# EAGLE board BMM (EAGLE 6.5.0)
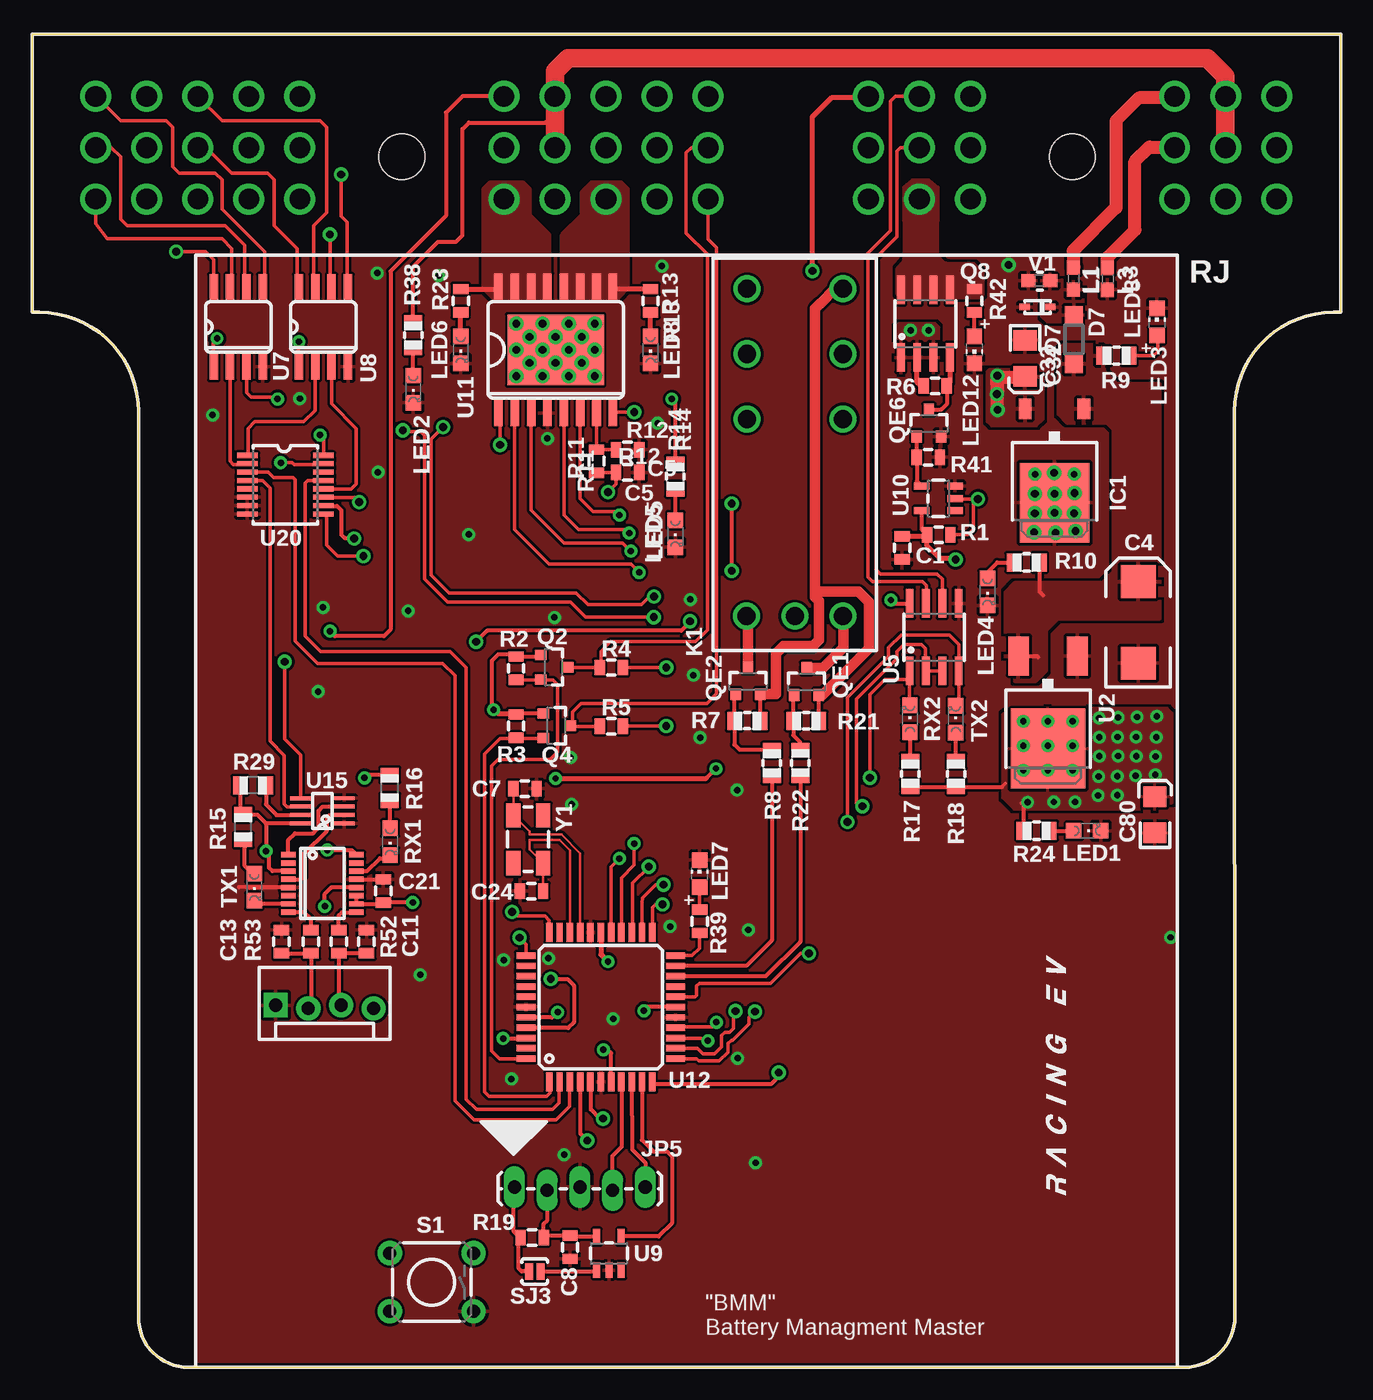
[diagram p0: board, top side]
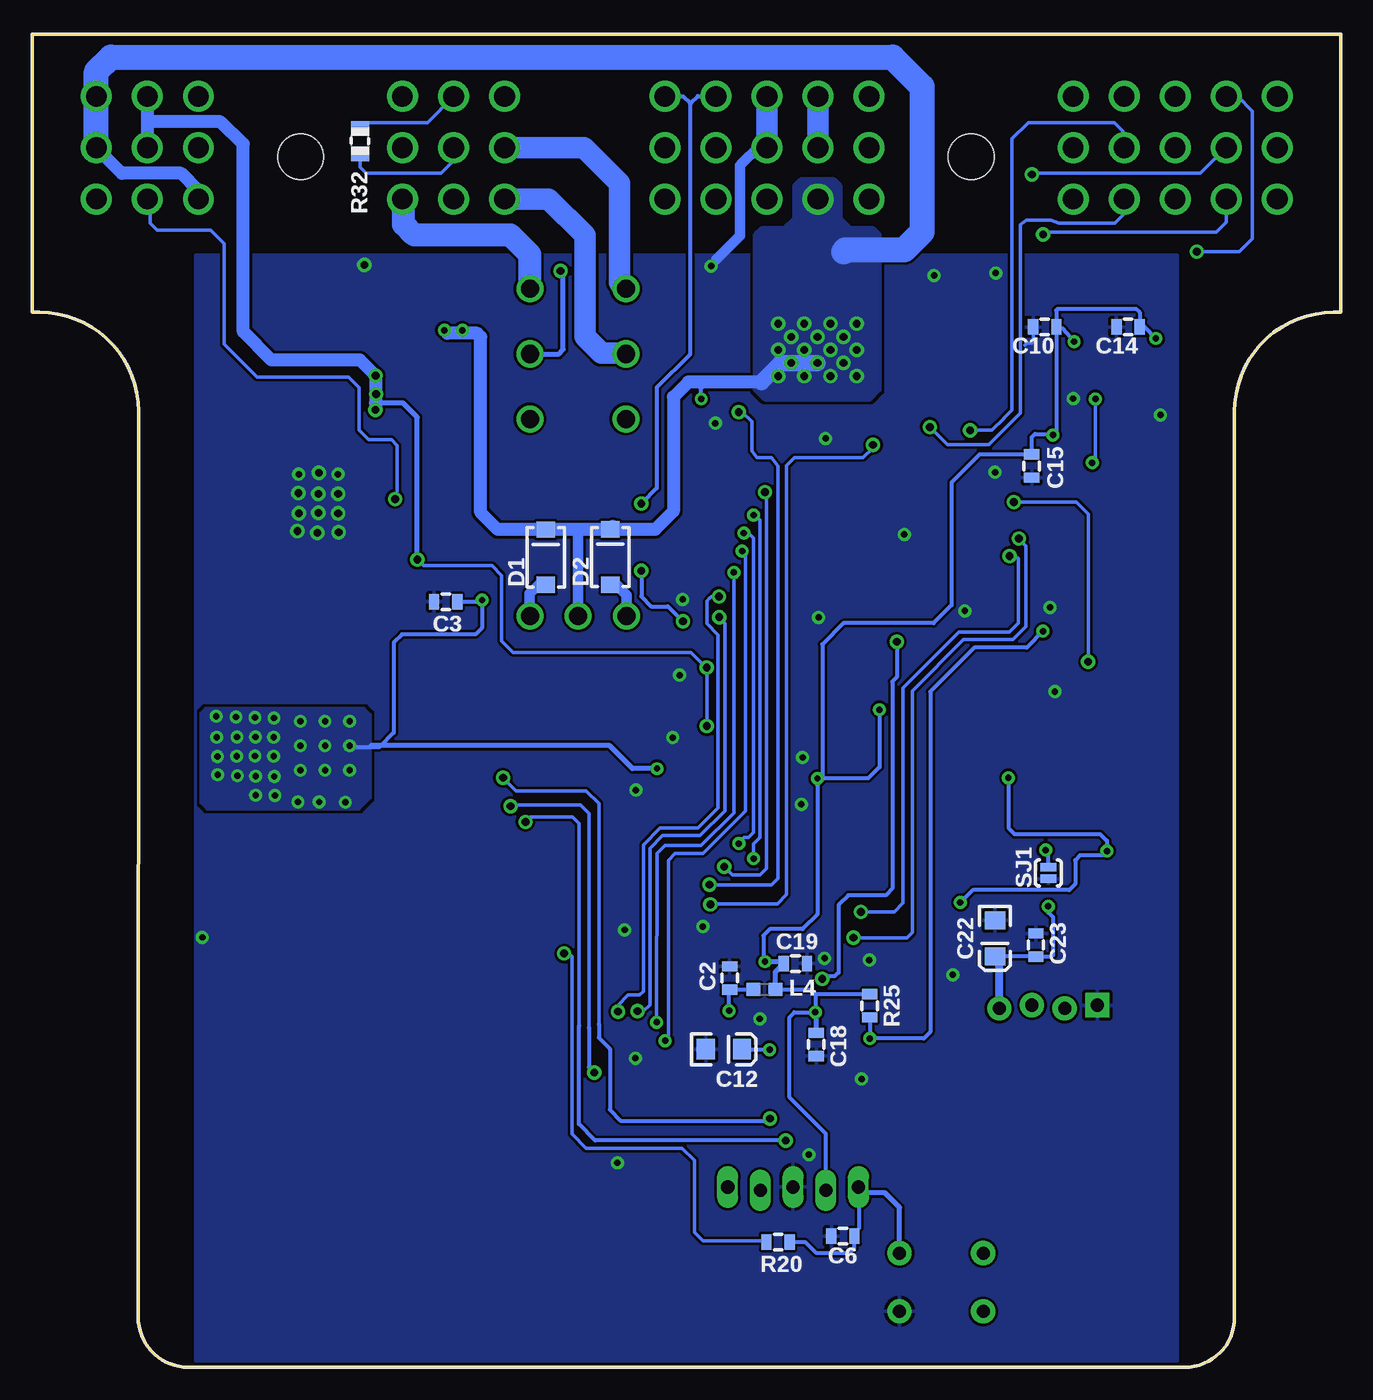
[diagram p1: board, bottom side, seen from below]

Size 101.6 x 103.51 mm. Coordinates in mm from the lower left corner, seen from the top.
Copper layers (1*16): Top 0.035mm / dielectric 1.5mm / Bottom 0.035mm
Design rules "SparkFun": minimum track width 8mil, minimum drill 20mil, track to track 8mil, track to pad 8mil, pad to pad 8mil, via to via 8mil, smd to smd 8mil, copper to edge 10mil, drill to drill 8mil, minimum pad ring 12mil, minimum via ring 10mil, stop-mask expansion 4mil, vias tented up to drill 25mil, thermal gap 10mil

## Footprints (pad centres in the part's own frame; a part is rotated, then mirrored left to right if it is on the bottom)
0805 = smd 0.8 x 1.2: 1 -0.9,0; 2 0.9,0
EIA7343 = smd 2.55 x 2.7: A 3.17,0; C -3.17,0
EIA3216 = smd 1.4 x 1.6: A 1.4,0; C -1.4,0
POLC1206 = smd 1.6 x 1.8: 1 -1.4,0; 2 1.4,0
581-01-48-009 = drill 1.6: 1 -45.872,4.699; 2 -45.872,0.711; 3 -45.872,-3.277; 4 -41.91,4.699; 5 -41.91,0.711; 6 -41.91,-3.277; 7 -37.948,4.699; 8 -37.948,0.711; 9 -37.948,-3.277; 10 -33.985,4.699; 11 -33.985,0.711; 12 -33.985,-3.277; 13 -30.023,4.699; 14 -30.023,0.711; 15 -30.023,-3.277; 16 -14.173,4.699; 17 -14.173,0.711; 18 -14.173,-3.277; 19 -10.211,4.699; 20 -10.211,0.711; 21 -10.211,-3.277; 22 -6.248,4.699; 23 -6.248,0.711; 24 -6.248,-3.277; 25 -2.286,4.699; 26 -2.286,0.711; 27 -2.286,-3.277; 28 1.676,4.699; 29 1.676,0.711; 30 1.676,-3.277; 31 14.122,4.699; 32 14.122,0.711; 33 14.122,-3.277; 34 18.085,4.699; 35 18.085,0.711; 36 18.085,-3.277; 37 22.047,4.699; 38 22.047,0.711; 39 22.047,-3.277; 40 37.897,4.699; 41 37.897,0.711; 42 37.897,-3.277; 43 41.859,4.699; 44 41.859,0.711; 45 41.859,-3.277; 46 45.822,4.699; 47 45.822,0.711; 48 45.822,-3.277 | hole 3.556: -22.098,0; 29.972,0
SMA-DIODE = smd 1.27 x 1.47: A -2.15,0; C 2.15,0
SOD-523F = smd 0.8 x 0.5: A -1,0; C 1,0
SOD123 = smd 1.4 x 1.4: A 1.9,0; C -1.9,0
TO252 = smd 1 x 1.6: 1 -2.28,-4.8; 2 2.28,-4.8 | smd 5.4 x 6.2: 3 0,2.5
1X05_LOCK_LONGPADS = drill 1.016 long: 1 0,0; 2 2.54,-0.254; 3 5.08,0; 4 7.62,-0.254; 5 10.16,0
MOLEX-1X4_LOCK = drill 1.016 pad 1.88 square: 1 0,0.127 | drill 1.016 pad 1.88: 2 2.54,-0.127; 3 5.08,0.127; 4 7.62,-0.127
RT424F24 = drill 1.4: 11 11.6,-3.75; 12 6.55,-3.75; 14 16.65,-3.75; 21 11.6,3.7; 22 6.55,3.7; 24 16.65,3.7; A1 -8.75,-3.75; A2 -8.75,3.75; A3 -8.75,0
0603 = smd 1.1 x 1: 1 -0.85,0; 2 0.85,0
CHIPLED_0805 = smd 1.2 x 1.2: A 0,-1.05; C 0,1.05
CHIP-LED0805 = smd 1.2 x 1.2: A 0,-1.05; C 0,1.05
SOT23-3 = smd 0.8 x 0.9: 1 -0.95,-1; 2 0.95,-1; 3 0,1.1
SO08 = smd 0.61 x 2.21: 1 -1.905,-2.616; 2 -0.635,-2.616; 3 0.635,-2.616; 4 1.905,-2.616; 5 1.905,2.616; 6 0.635,2.616; 7 -0.635,2.616; 8 -1.905,2.616
SOT-23 = smd 0.8 x 0.9: 1 -0.95,-0.23; 2 0.95,-0.23; 3 0,1.87
R0805 = smd 1.1 x 1.4: 1 -1,0; 2 1,0
TACTILE-PTH = drill 1.016 pad 1.88: 1 -3.251,2.261; 2 3.251,2.261; 3 -3.251,-2.261; 4 3.251,-2.261
PAD-JUMPER-2-NO_YES_SILK = smd 0.635 x 1.27: 1 -0.45,0; 2 0.45,0
SJ_2S-NO = smd 0.635 x 1.27: 1 -0.45,0; 2 0.45,0
V-REG_DPACK = smd 1.6 x 3: 1 -2.28,-4.8; 3 2.28,-4.8 | smd 5.8 x 6.2: 4 0,2.38
VFSOP-8 = smd 0.3 x 1.6: 1 -0.98,-1.7; 2 -0.33,-1.7; 3 0.33,-1.7; 4 0.98,-1.7; 5 0.97,1.69; 6 0.325,1.7; 7 -0.33,1.7; 8 -0.98,1.71
SO-8 = smd 0.61 x 2.21: 1 -1.905,-2.616; 2 -0.635,-2.616; 3 0.635,-2.616; 4 1.905,-2.616; 5 1.905,2.616; 6 0.635,2.616; 7 -0.635,2.616; 8 -1.905,2.616
SO08' = smd 0.66 x 2.032: 1 -1.905,-3.073; 2 -0.635,-3.073; 3 0.635,-3.073; 4 1.905,-3.073; 5 1.905,3.073; 6 0.635,3.073; 7 -0.635,3.073; 8 -1.905,3.073
SOT23-5L = smd 0.55 x 1.2: 1 -0.95,-1.3; 2 0,-1.3; 3 0.95,-1.3; 4 0.95,1.3; 5 -0.95,1.3
SOT23-5 = smd 0.55 x 1.2: 1 -0.95,-1.3; 2 0,-1.3; 3 0.95,-1.3; 4 0.95,1.3; 5 -0.95,1.3
SO-16-POWER = smd 2.032 x 0.66: 1 -4.902,4.445; 2 -4.902,3.175; 3 -4.902,1.905; 4 -4.902,0.635; 5 -4.902,-0.635; 6 -4.902,-1.905; 7 -4.902,-3.175; 8 -4.902,-4.445; 9 4.902,-4.445; 10 4.902,-3.175; 11 4.902,-1.905; 12 4.902,-0.635; 13 4.902,0.635; 14 4.902,1.905; 15 4.902,3.175; 16 4.902,4.445 | smd 5.5 x 7.5: EP 0,0
TQFP-44 = smd 1.5 x 0.5: 1 -5.8,4; 2 -5.8,3.2; 3 -5.8,2.4; 4 -5.8,1.6; 5 -5.8,0.8; 6 -5.8,0; 7 -5.8,-0.8; 8 -5.8,-1.6; 9 -5.8,-2.4; 10 -5.8,-3.2; 11 -5.8,-4; 23 5.8,-4; 24 5.8,-3.2; 25 5.8,-2.4; 26 5.8,-1.6; 27 5.8,-0.8; 28 5.8,0; 29 5.8,0.8; 30 5.8,1.6; 31 5.8,2.4; 32 5.8,3.2; 33 5.8,4 | smd 0.5 x 1.5: 12 -4,-5.8; 13 -3.2,-5.8; 14 -2.4,-5.8; 15 -1.6,-5.8; 16 -0.8,-5.8; 17 0,-5.8; 18 0.8,-5.8; 19 1.6,-5.8; 20 2.4,-5.8; 21 3.2,-5.8; 22 4,-5.8; 34 4,5.8; 35 3.2,5.8; 36 2.4,5.8; 37 1.6,5.8; 38 0.8,5.8; 39 0,5.8; 40 -0.8,5.8; 41 -1.6,5.8; 42 -2.4,5.8; 43 -3.2,5.8; 44 -4,5.8
SSOP-16 = smd 0.419 x 1.143: 1 -2.223,-2.642; 2 -1.587,-2.642; 3 -0.953,-2.642; 4 -0.318,-2.642; 5 0.318,-2.642; 6 0.953,-2.642; 7 1.587,-2.642; 8 2.223,-2.642; 9 2.223,2.642; 10 1.587,2.642; 11 0.953,2.642; 12 0.318,2.642; 13 -0.318,2.642; 14 -0.953,2.642; 15 -1.587,2.642; 16 -2.223,2.642
TSSOP-16 = smd 0.4 x 1.6: 1 -2.225,-2.85; 2 -1.575,-2.85; 3 -0.925,-2.85; 4 -0.275,-2.85; 5 0.375,-2.85; 6 1.025,-2.85; 7 1.675,-2.85; 8 2.325,-2.85; 9 2.325,3.05; 10 1.675,3.05; 11 1.025,3.05; 12 0.375,3.05; 13 -0.275,3.05; 14 -0.925,3.05; 15 -1.575,3.05; 16 -2.225,3.05
CRYSTAL-SMD-5X3 = smd 1.9 x 1.1: 1 -1.85,-1.15; 2 1.85,-1.15; 3 1.85,1.15; 4 -1.85,1.15

## Placement (x,y rotation side)
C1  0.1uf  [0805]  67.54,63.63 270 top
C2  0.1uF  [0805]  47.45,30.23 90 bottom
C3  0.1uf  [0805]  69.49,59.44 180 bottom
C4  100uF  [EIA7343]  85.88,57.84 90 top
C5  [0805]  46.23,69.47 0 top
C6  10nF  [0805]  38.66,10.19 180 bottom
C7  12pF  [0805]  38.25,44.93 0 top
C8  0.1uf  [0805]  41.76,9.32 270 top
C10  0.1uf  [0805]  22.99,80.77 180 bottom
C11  47pf  [0805]  25.96,33.05 90 top
C12  10uF  [EIA3216]  47.9,24.69 0 bottom
C13  47pf  [0805]  19.35,33.05 90 top
C14  0.1uf  [0805]  16.51,80.77 180 bottom
C15  0.1uf  [0805]  24,69.98 270 bottom
C18  0.1uF  [0805]  40.72,25.07 270 bottom
C19  0.1uF  [0805]  42.34,31.34 0 bottom
C21  0.1uf  [0805]  27.25,36.98 90 top
C22  4.7uF  [EIA3216]  26.85,33.3 270 bottom
C23  0.1uf  [0805]  23.67,32.79 90 bottom
C24  12pF  [0805]  38.76,36.98 180 top
C32  10uF  [POLC1206]  77.09,78.33 90 top
C80  10uF  [POLC1206]  87.17,42.9 270 top
CASE1  581-01-48-009  [581-01-48-009]  50.8,93.98 0 top
D1  [SMA-DIODE]  61.72,62.89 90 bottom
D2  [SMA-DIODE]  56.72,62.92 90 bottom
D3  MM5Z30  [SOD-523F]  78.05,82.32 0 top
D7  1N4001  [SOD123]  80.87,79.81 90 top
IC1  7805DT  [TO252]  79.38,69.62 180 top
JP5  ICSP  [1X05_LOCK_LONGPADS]  37.44,14 0 top
JP13  [MOLEX-1X4_LOCK]  18.9,27.99 0 top
K1  RT424F24  [RT424F24]  59.21,67.08 90 top
L1  FB  [0603]  80.85,84.53 270 top
L3  FB  [0603]  83.49,84.51 270 top
L4  FB  [0603]  44.75,29.34 0 bottom
LED1  Green  [CHIPLED_0805]  81.92,41.66 270 top
LED2  Green  [CHIPLED_0805]  29.59,75.95 180 top
LED3  [CHIP-LED0805]  87.33,81.18 0 top
LED4  Green  [CHIPLED_0805]  74.17,60.2 180 top
LED5  Green  [CHIPLED_0805]  49.94,64.72 180 top
LED6  [CHIPLED_0805]  33.27,78.99 180 top
LED7  [CHIP-LED0805]  51.82,38.33 0 top
LED8  [CHIPLED_0805]  48.01,78.99 180 top
LED12  [CHIP-LED0805]  73.15,78.99 180 top
Q2  BSS123  [SOT23-3]  40.49,54.36 270 top
Q4  BSS123  [SOT23-3]  40.69,49.81 270 top
Q8  Si9435BDY  [SO08]  69.34,81.03 0 top
QE1  BSS123  [SOT-23]  60.12,52.43 0 top
QE2  BSS123  [SOT-23]  55.58,52.48 0 top
QE6  BSS123  [SOT-23]  69.62,72.49 0 top
R1  1k  [0805]  70.38,64.64 180 top
R2  2k  [0805]  37.57,54.28 90 top
R3  2k  [0805]  37.57,49.78 90 top
R4  10k  [0805]  44.96,54.33 0 top
R5  10k  [0805]  44.96,49.78 0 top
R6  22k  [0805]  70.1,76.2 180 top
R7  100K  [R0805]  55.52,50.16 180 top
R8  1K  [R0805]  57.43,46.91 90 top
R9  1.2k  [R0805]  84.18,78.54 180 top
R10  1.2k  [R0805]  77.22,62.48 0 top
R11  10k  [0805]  43.81,70.36 270 top
R12  [0805]  46.23,71.25 180 top
R13  3.3k  [0805]  48.01,82.8 90 top
R14  3.3k  [R0805]  49.94,69.16 90 top
R15  1K  [R0805]  16.38,41.94 90 top
R16  1k  [R0805]  27.76,44.98 90 top
R17  1K  [R0805]  68.17,46.08 270 top
R18  1k  [R0805]  71.73,46.08 270 top
R19  10k  [0805]  38.81,10.08 0 top
R20  499  [0805]  43.69,9.73 180 bottom
R21  100K  [R0805]  60.1,50.19 180 top
R22  1K  [R0805]  59.64,46.91 270 top
R23  3.3k  [0805]  33.27,82.8 90 top
R24  499  [R0805]  77.98,41.66 180 top
R25  10k  [0805]  36.58,28.07 90 bottom
R29  1K  [R0805]  17.15,45.19 180 top
R32  120  [R0805]  76.15,95.2 90 bottom
R38  1k  [R0805]  29.59,80.14 90 top
R39  499  [0805]  51.82,34.62 270 top
R41  100k  [0805]  69.57,70.66 180 top
R42  2.2k  [0805]  73.15,82.8 90 top
R52  27  [0805]  23.8,33.05 90 top
R53  27  [0805]  21.64,33.05 90 top
RX1  [CHIPLED_0805]  27.79,40.79 180 top
RX2  RED  [CHIPLED_0805]  68.15,50.34 0 top
S1  ts  [TACTILE-PTH]  31.01,6.6 180 top
SJ1  [PAD-JUMPER-2-NO_YES_SILK]  22.71,38.38 90 bottom
SJ3  SJ-NO  [SJ_2S-NO]  39.01,7.44 180 top
TX1  [CHIPLED_0805]  17.25,37.26 180 top
TX2  GREEN  [CHIPLED_0805]  71.7,50.32 0 top
U2  NCP1117DT33T5G  [V-REG_DPACK]  78.87,50.42 180 top
U4  SN74LVC2G241DCTR  [VFSOP-8]  22.53,43.21 90 top
U5  SN75HVD08DR  [SO-8]  70.03,56.69 0 top
U7  ISL83077  [SO08']  16,80.77 0 top
U8  ISL83077  [SO08']  22.61,80.77 0 top
U9  MAX823  [SOT23-5L]  44.78,8.84 0 top
U10  NC7S14M5X  [SOT23-5]  70.36,67.46 90 top
U11  VND7040AJTR-E  [SO-16-POWER]  40.64,78.99 90 top
U12  DSPIC33FJ128GP804  [TQFP-44]  44.15,27.97 90 top
U15  FT230X  [SSOP-16]  22.53,37.57 270 top
U20  CD74HC4052PWR  [TSSOP-16]  19.56,68.58 270 top
U$1  LOGOM  [L-M]  82.3,5.84 90 top
U$2  INDPK1  [PICKIT-PIN-1]  37.39,16.54 0 top
V1  13Vdc  [0603]  78.18,84.35 0 top
Y1  12Mhz  [CRYSTAL-SMD-5X3]  38.51,41 270 top

## Library data of the parts
C1 C3 C8 C10 C11 C13-C15 C21-C23 R1 R6 R41 R42 = SparkFun
C2 C4 C6 C7 C18 C19 C24 = SparkFun-Capacitors
C5 L4 R2-R5 R11-R13 R19 R23 R25 R39 R52 R53 SJ1 SJ3 = SparkFun-Passives
C12 = SparkFun-Capacitors; PROD_ID: CAP-00811
C32 C80 = RJ's_parts
CASE1 K1 U5 U10-U12 U15 = FSAE Eletric
D1 D2 Q8 = SparkFun-DiscreteSemi
D3 L1 L3 V1 = EmEndev
D7 = diode
IC1 LED1-LED8 LED12 R7-R10 R14-R18 R21 R22 R24 R29 R32 R38 RX1 RX2 TX1 TX2 = adafruit
JP5 JP13 = SparkFun-Connectors
Q2 Q4 = SparkFun-DiscreteSemi; PROD_ID: TRANS-08345
QE1 QE2 QE6 = DFT
R20 = SparkFun-Resistors
S1 = SparkFun-Electromechanical
U2 = SparkFun-PowerIC
U4 = Cleaverbrooks
U7-U9 U20 = NASA_LIB
U$1 = Pic
U$2 = FSAE Eletric (2)
Y1 = SparkFun-FreqCtrl

## Nets
3V: C21.1 R15.2 R16.2 R29.2 U4.8 U15.3 U15.10 U15.11
!FLT: U11.2 U12.15
+3V3: C3.1 C8.1 C10.1 C14.1 C15.1 C18.1 C19.1 C80.1 JP5.2 L4.2 Q2.1 Q4.1 R2.2 R3.2 R17.2 R18.2 R19.2 R24.2 R25.2 U2.4 U5.8 U7.1 U8.1 U9.5 U12.28 U12.40 U20.16
+5V: C1.1 C32.1 CASE1.19 CASE1.20 CASE1.43 CASE1.44 IC1.2 R1.2 R4.2 R5.2 R38.2 U10.5
+9V: C4.A D7.C IC1.1 R9.2 R10.2 U2.3
ASEN: C5.1 R11.2 U12.25
BMS-P-EN: CASE1.25 CASE1.28 U12.41
BMS-RX: U12.3 U20.3
BMS-RXB1: U8.2 U20.1
BMS-RXB2: U7.2 U20.2
BMS-SET: R8.1 U12.21
BMS-SS: R22.2 U12.20
BMS-TX: U12.2 U20.13
BMS-TXB1: U8.3 U20.12
BMS-TXB2: U7.3 U20.15
BOX1-TALK: CASE1.12 U12.12
BOX2-TALK: CASE1.11 U12.13
C_N: C7.1 U12.30 Y1.1
C_P: C24.1 U12.31 Y1.3
FAN1: CASE1.24 R13.2 U11.9 U11.10 U11.11 U11.12
FAN1-EN: U11.1 U12.23
FAN2: CASE1.18 R23.2 U11.13 U11.14 U11.15 U11.16
FAN2-EN: U11.8 U12.24
FAN-SS: CASE1.16 R25.1 U12.42
GND: C1.2 C2.2 C3.2 C4.C C5.2 C6.2 C7.2 C8.2 C10.2 C11.2 C12.C C13.2 C14.2 C15.2 C18.2 C19.2 C21.2 C22.C C23.2 C24.2 C32.2 C80.2 CASE1.22 CASE1.23 D3.A IC1.3 JP5.3 JP13.1 L3.2 LED1.C LED2.C LED3.C LED4.C LED5.C LED6.C LED7.C LED8.C LED12.C QE6.2 R12.1 R41.1 S1.1 SJ1.1 U2.1 U4.1 U4.4 U5.5 U7.4 U8.4 U9.2 U10.3 U11.4 U12.6 U12.16 U12.29 U12.39 U15.5 U15.13 U20.6 U20.7 U20.8 V1.1
GNDIO: CASE1.41 L3.1
HV-SENSE: CASE1.45 R1.1 U10.2
N$1: LED8.A R13.1
N$3: D1.A K1.A1 QE1.3
N$4: LED1.A R24.1
N$5: D2.A K1.A2 QE2.3
N$6: LED6.A R23.1
N$7: QE2.1 R7.2 R8.2
N$8: LED3.A R9.1
N$10: R11.1 R12.2 U11.7
N$11: LED4.A R10.1
N$12: LED5.A R14.1
N$13: CASE1.33 K1.21
N$14: R52.2 U15.9
N$15: R15.1 TX1.A
N$16: R16.1 RX1.A
N$17: TX1.C U15.7
N$18: RX1.C U15.14
N$19: R18.1 TX2.A
N$20: U4.2 U15.4
N$21: U4.3 U15.1
N$22: LED2.A R38.1
N$23: LED7.A R39.1
N$25: CASE1.1 U7.5
N$27: SJ3.1 U9.1
N$28: C2.1 L4.1 U12.17
N$29: C12.A U12.7
N$30: QE1.1 R21.2 R22.1
N$31: CASE1.2 U7.6
N$33: CASE1.3 U7.7
N$34: CASE1.4 U7.8
N$35: CASE1.5 U8.5
N$36: CASE1.32 K1.24
N$37: CASE1.6 U8.6
N$38: CASE1.7 U8.7
N$39: CASE1.8 U8.8
N$40: R17.1 RX2.A
N$42: CASE1.31 K1.11
N$43: Q8.4 QE6.3 R6.1
N$44: R39.2 U12.22
N$45: C6.1 JP5.1 R19.1 R20.1 S1.3 SJ3.2
N$46: R20.2 U12.18
N$47: JP5.4 U12.8
N$48: JP5.5 U12.9
N$50: LED12.A R42.1
N$54: R53.2 U15.8
N$55: C11.1 JP13.3 R52.1
N$61: C13.1 JP13.2 R53.1
N$62: SJ1.2 U15.16
N$63: D3.C D7.A L1.2 V1.2
N$69: R29.1 U4.7
N$72: U4.6 U20.4
N$78: U4.5 U20.11
N$85: C22.A C23.1 JP13.4 U15.12
RS-A: CASE1.35 R32.1 U5.6
RS-B: CASE1.34 R32.2 U5.7
RX2: RX2.C U5.1 U12.5
S0: U12.34 U20.10
S1: U12.33 U20.9
SCL: Q2.2 R2.1 U12.44
SCL_5V: CASE1.29 Q2.3 R4.1
SDA: Q4.2 R3.1 U12.1
SDA_5V: CASE1.30 Q4.3 R5.1
SEN0: U11.5 U12.26
SEN1: U11.6 U12.27
SEN_EN: U11.3 U12.14
TSAL: CASE1.36 Q8.5 Q8.6 Q8.7 Q8.8 R42.2
TSAL_EN: QE6.1 R41.2 U10.4
TX2: TX2.C U5.4 U12.4
U5-RE/DE: U5.2 U5.3 U12.11
V+: CASE1.21 CASE1.42 CASE1.46 CASE1.47 D1.C D2.C K1.A3 Q8.1 Q8.2 Q8.3 R6.2 R14.2 U11.EP
VCCIO: CASE1.40 L1.1
VSS: CASE1.39 K1.14 QE1.2 QE2.2 R7.1 R21.1
WDI: U9.4 U12.10

## Tracks (layer width: path | path; a pad name or v marks a point on that pad's centre or on a via)
3V  (via drill 0.5)
  Top 0.305: U15.11 U15.10 27.15,35.98 C21.1 27.27,36.09 v29.54,36.09 | U15.3 18.66,38.52 18.39,38.79 18.39,39.85 v18.16,40.08 18.16,42.22 | 18.16,42.22 17.47,42.91 R15.2 16.14,43.17 R29.2 | U4.8 18.28,42.23 18.16,42.22 | R16.2 26.02,45.98 v25.81,45.77
  Bottom 0.305: v29.54,36.09 28.57,37.06 21.08,37.06 20.62,37.52 20.62,39.37 20.24,39.75 18.54,39.75 18.21,40.08 v18.16,40.08 18.16,40.87 18.69,41.4 25.32,41.4 25.81,41.88 v25.81,45.77
!FLT  (via drill 0.5)
  Top 0.254: U11.2 37.47,65.02 40.13,62.36 46.48,62.36 v47.12,61.72 | v53.11,26.8 52.86,26.42 50,26.42 U12.15
  Bottom 0.254: v47.12,61.72 47.12,43.05 49.66,40.51 52.45,40.51 53.09,39.88 53.11,27.05 v53.11,26.8
+3V3  (via drill 0.48, 0.5)
  Top 0.254: R17.2 68.16,45.08 68.1,45.14 | 75.3,45.08 75.56,45.34 | U20.16 22.61,72.13 v22.35,72.39 | U12.40
  Top 0.305: v40.79,27.56 40.77,27.56 40.36,27.15 U12.40 | 36.11,50.76 36.18,50.68 R3.2 37.64,50.76 Q4.1 36.11,50.76 | Q2.1 39.36,55.18 R2.2 37.37,55.37 36.2,55.37 35.69,54.86 35.69,51.18 v35.81,51.05 36.11,50.76 | v66.67,59.56 66.93,59.31 U5.8 | 52.32,45.72 v53.09,46.48 | JP5.2 40,13.72 40,11.43 39.71,11.14 R19.2 39.85,10.22 C8.1 41.84,10.14 U9.5 | R24.2 76.98,43.67 76.83,43.81 | R17.2 R18.2 75.3,45.08 | U8.1 v20.7,79.63 | U7.1 14.1,79.63 v14.35,79.88
  Top 0.406: U12.28 44.15,32.05 v44.7,31.5 | v40.64,45.72 52.32,45.72
  Bottom 0.254: C10.1 22.09,80.99 22.1,81
  Bottom 0.305: L4.2 41.17,29.34 40.8,28.97 | 40.8,28.97 40.79,28.96 v40.79,27.56 42.42,27.56 42.8,27.18 42.8,20.96 39.98,18.14 JP5.2 | 75.44,48.13 74.68,48.13 73.53,49.28 73.53,56.26 72.9,56.9 67.18,56.9 66.67,57.4 v66.67,59.56 66.8,59.44 C3.1 | 75.44,48.13 76.83,48.13 v76.96,48.26 | v35.81,51.05 35.81,46.61 36.7,45.72 v40.64,45.72 40.64,45.21 | 75.31,48.26 75.44,48.13 | 40.64,45.21 40.64,35.18 41.78,34.04 44.32,34.04 44.83,33.53 44.83,31.62 v44.7,31.5 | 40.64,45.21 40.26,45.59 40.26,56.13 38.61,57.79 31.62,57.79 30.23,59.18 30.23,68.71 28.06,70.88 C15.1 24,72.21 23.75,72.47 22.43,72.47 v22.35,72.39 22.1,72.64 22.1,81 22.1,82.04 21.97,82.17 15.88,82.17 15.61,81.9 C14.1 15.23,80.77 v14.35,79.88 | v20.7,79.63 21.59,80.64 21.96,80.64 C10.1 | R25.2 40.8,28.97
  Bottom 0.406: C18.1 40.72,27.48 v40.79,27.56 | L4.2 43.91,30.68 C19.1 43.39,31.5 v44.7,31.5 | v53.09,46.48 54.99,46.48 56.77,48.26 75.31,48.26
  other vias: 76.96,50.16 78.87,50.16 80.77,50.16 78.87,48.26 80.77,48.26 76.96,46.36 78.87,46.36 80.77,46.36 82.83,50.42 82.85,48.92 82.85,47.45 82.8,45.87 84.3,50.44 84.28,48.95 84.3,47.47 84.25,45.9 85.78,50.5 85.7,48.95 85.72,47.45 85.67,45.92 87.33,50.55 87.27,48.92 87.22,47.42 87.2,46 82.75,44.4 84.25,44.42 80.98,43.89 79.32,43.89 77.29,43.87
  pour Top: 75.95,51.18 88.14,51.18 88.52,50.8 88.52,43.81 88.01,43.31 76.2,43.31 75.31,44.2 75.31,50.67
  pour Bottom: 75.31,50.67 75.82,51.18 88.14,51.18 88.52,50.8 88.52,43.81 88.01,43.31 76.2,43.31 75.31,44.2
+5V  (via drill 0.6)
  Top 0.254: R5.2 v49.23,49.78 | v49.23,54.33 R4.2
  Top 0.305: U10.5 69.06,65.07 R1.2 | R38.2 29.59,85.47 31.5,87.38 32.89,87.38 33.4,87.88 33.4,96.14 33.91,96.65 39.85,96.65 40.23,97.03 40.34,97.03 40.59,97.28
  Top 0.406: C1.1 69.37,64.53 R1.2 69.47,64.63 69.47,63.78 70.43,62.81 71.6,62.81 v71.7,62.71
  Top 1.016: v74.93,76.99 74.93,75.59 v74.91,75.56 | v74.95,74.35 74.95,76.22 74.91,76.28 74.91,76.73 75.06,76.89 77.04,76.89 C32.1
  Top 1.422: CASE1.20 40.59,97.28 40.59,100.61 41.61,101.62 91.24,101.62 92.63,100.23 92.63,94.72 CASE1.44
  Bottom 0.254: v49.23,49.78 v49.23,54.33 49.3,54.33 50.47,55.5 64.26,55.5 65.15,56.39 65.15,61.47 65.91,62.23 71.22,62.23 v71.7,62.71
  Bottom 0.406: v71.7,62.71 71.7,73.76 72.82,74.88 74.95,74.88
  Bottom 0.813: CASE1.20 40.59,96.47 40.23,96.83 40.23,98.48 40.79,99.03 | 92.63,98.7 CASE1.43 | CASE1.44 92.94,94.69
  Bottom 1.016: CASE1.44 92.63,96.7 | 92.63,96.7 CASE1.43 | v74.93,76.99 76.15,78.21 83.03,78.21 85.22,80.39 85.22,95 86.97,96.7 92.63,96.7 | v74.91,75.56 74.91,76.94 74.95,76.99 74.95,74.88 v74.95,74.35
  Bottom 1.676: CASE1.19 CASE1.20
  pour Top: 74.37,77.44 77.83,77.44 78.44,76.83 78.44,73.63 77.9,73.1 74.55,73.1 74.19,73.46 74.19,77.27
+9V
  Top 0.305: U2.3 78,55.22 78.11,55.12 | R10.2 78.22,60.21 78.49,59.94
  pour Top: 79.65,78.94 79.65,74.04 80.34,73.36 83.44,73.36 83.95,72.85 83.95,61.75 83.08,60.88 76.28,60.88 75.54,60.15 75.54,54.05 76.3,53.29 77.93,53.29 78.74,54.1 78.74,57.25 79.63,58.14 87.55,58.14 87.55,76.33 84.2,76.33 83.24,77.29 83.24,78.94 82.83,79.35 80.06,79.35
ASEN  (via drill 0.6)
  Top 0.254: R11.2 43.83,69.47 C5.1 45.33,68.57 v44.7,67.95 | v47.88,38.86 46.61,37.59 46.61,33.83 U12.25
  Bottom 0.254: v44.7,67.95 44.58,67.82 44.58,38.73 45.09,38.23 47.24,38.23 v47.88,38.86
BMS-P-EN  (via drill 0.6)
  Top 0.305: v54.3,67.06 v54.3,61.85 | v51.08,57.91 51.08,57.89 50.39,57.2 35.33,57.2 v34.47,56.34 | v40.26,30.15 41.55,30.15 42.06,29.64 42.06,26.8 41.61,26.34 38.37,26.34 U12.41
  Bottom 0.254: CASE1.25 48.54,98.7
  Bottom 0.305: CASE1.28 51.05,98.68 50.55,98.17 | 50.55,98.17 50.55,78.64 53.11,76.07 53.11,68.25 v54.3,67.06 | 50.55,98.17 50.44,98.17 49.91,98.7 48.54,98.7 | v54.3,61.85 54.3,59.84 53.54,59.08 52.25,59.08 v51.08,57.91 | v34.47,56.34 34.47,53.59 34.82,53.24 34.82,37.16 35.33,36.65 38.23,36.65 38.99,35.89 38.99,30.66 39.29,30.35 40.06,30.35 v40.26,30.15
BMS-RX
  Top 0.254: U20.3 18.33,69.5 18.75,69.09 20.24,69.09 20.4,68.94 20.4,56.39 22.15,54.63 31.88,54.66 32.82,53.72 32.84,20.68 34.29,19.23 40.69,19.23 41.73,20.27 41.73,22.15 U12.3
BMS-RXB1
  Top 0.254: U8.2 21.97,74.3 21.08,73.41 17.27,73.41 16.76,72.9 16.76,70.86 U20.1
BMS-RXB2
  Top 0.254: U7.2 15.37,70.36 15.62,70.1 16.66,70.1 U20.2
BMS-SET
  Top 0.305: R8.1 57.43,33.15 55.45,31.17 U12.21
BMS-SS
  Top 0.305: R22.2 59.64,33.05 56.95,30.35 U12.20
BMS-TX
  Top 0.254: U20.13 21.38,68.86 21.18,68.66 21.18,56.77 22.38,55.58 32.46,55.58 33.71,54.33 33.71,20.8 34.49,20.02 40.39,20.02 40.92,20.55 40.92,22.14 U12.2
BMS-TXB1
  Top 0.254: U8.3 23.24,74.8 25.15,72.9 25.15,68.58 24.77,68.2 U20.12
BMS-TXB2  (via drill 0.5)
  Top 0.254: U7.3 16.64,75.69 17.02,75.31 18.92,75.31 v19.05,75.18 | v19.3,70.23 20.19,70.23 20.32,70.1 22.56,70.1 U20.15
  Bottom 0.254: v19.05,75.18 19.05,70.48 v19.3,70.23
BOX1-TALK  (via drill 0.6)
  Top 0.254: U12.12 51.57,23.96 51.77,23.77 53.34,23.77 54.03,24.46 54.03,25.15 54.28,25.4 54.38,25.4 55.65,26.67 55.65,27.15 v56.11,27.61 | v48.29,59.84 47.93,59.84 47.3,59.21 43.16,59.21 42.24,60.12 32.39,60.12 30.99,61.52 30.99,72.08 v31.9,73
  Bottom 0.254: v56.11,27.61 56.11,28.12 55.32,28.91 54.43,28.91 54.15,29.18 54.15,40.56 52.86,41.86 49.91,41.86 48.34,43.43 48.34,56.87 49.23,57.76 49.23,59.51 49,59.74 48.97,59.74 48.87,59.84 v48.29,59.84 | CASE1.12 16.92,90.6 16.92,89.43 17.53,88.82 21.9,88.82 22.5,89.08 24.41,89.08 24.89,88.72 24.89,74.09 27.33,71.65 30.56,71.65 v31.9,73
BOX2-TALK  (via drill 0.6)
  Top 0.254: U12.13 51.66,24.77 52.09,24.33 52.98,24.33 53.52,24.87 53.52,25.76 53.77,26.01 54.15,26.01 54.46,26.31 54.46,27.51 v54.61,27.66 | v48.26,58.24 42.95,58.24 41.78,59.41 32.23,59.41 30.46,61.19 30.46,72.34 30.15,72.64 28.88,72.64 v28.78,72.75
  Bottom 0.254: v54.61,27.66 54.13,27.66 53.65,28.14 53.65,40.28 52.65,41.27 49.73,41.27 47.8,43.2 47.8,57.73 v48.26,58.24 | v28.78,72.75 27.08,72.75 26.16,73.66 26.16,73.69 25.53,74.32 25.53,95.38 24.26,96.65 17.58,96.65 16.92,95.99 16.92,94.79 CASE1.11
C_N
  Top 0.203: U12.30 42.55,39.91 41.11,41.35 38.61,41.35 38.61,41.59 Y1.1 C7.1
C_P
  Top 0.203: U12.31 41.74,40.14 40.94,40.95 38.61,40.95 38.61,40.19 Y1.3 C24.1
FAN1
  Top 0.406: R13.2 45.28,83.7 U11.9
  pour Top (no thermals): 41.15,87.88 41.15,83.06 45.47,83.06 46.23,83.82 46.23,91.44 45.72,91.95 43.43,91.95 42.67,91.19 42.67,89.41
FAN1-EN  (via drill 0.6)
  Top 0.254: v48.95,35.94 48.41,35.94 48.16,35.69 48.16,33.78 U12.23 | v36.32,71.63 36.32,73.97 U11.1
  Bottom 0.254: v48.95,35.94 48.9,35.99 43.74,35.99 43.03,36.7 43.03,70 42.42,70.61 37.08,70.61 36.32,71.37 v36.32,71.63
FAN2
  Top 0.406: R23.2 36,83.7 U11.16
  pour Top (no thermals): 35.56,91.95 35.05,91.44 35.05,83.82 35.81,83.06 39.88,83.06 40.13,83.31 40.13,87.88 38.61,89.41 38.61,91.44 38.1,91.95
FAN2-EN  (via drill 0.6)
  Top 0.254: v46.74,74.17 45.16,74.17 U11.8 | U12.24 47.34,36.04 47.37,36.45 48.39,37.47 v49.02,37.47
  Bottom 0.254: v49.02,37.47 44.2,37.47 43.69,37.97 43.69,69.98 44.2,70.61 45.34,70.61 45.72,71.12 45.72,73.41 46.48,74.17 v46.74,74.17
FAN-SS  (via drill 0.5)
  Top 0.305: CASE1.16 33.4,98.68 32.13,97.41 32.13,89.41 27.81,85.09 27.81,57.28 27.3,56.77 23.5,56.77 v23.11,57.15 | v36.58,25.53 38.31,25.53 U12.42
  Bottom 0.305: v23.11,57.15 24.38,55.88 28.45,55.88 31.88,52.45 31.88,26.04 32.39,25.53 v36.58,25.53 R25.1
GND  (via drill 0.5, 0.6)
  Top 0.305: U15.5 16.85,37.25 16.05,37.29 | U15.13 C21.2
  Bottom 0.254: C10.2 23.89,79.62 24,79.5 24.38,79.5 24.51,79.38
  Bottom 0.813: CASE1.23 45.26,94.69 46.48,93.47 46.51,93.47 46.63,93.29 46.63,87.86 48.49,86.06
  Bottom 1.676: CASE1.22 CASE1.23
  other vias: 80.9,66.29 79.38,67.82 75.82,85.6 77.85,66.29 14,73.94 26.8,84.96 40,72.11 77.85,69.34 80.9,69.34 26.85,69.49 40.54,58.22 51.1,59.61 22.58,59 22.2,52.45 30.12,30.48 88.39,33.38 20.78,75.21 36.6,31.62 45.11,27.05 54.76,24 55.6,33.96 41.3,16.51 56.16,15.88 54.74,44.81 49.53,34.21 48.9,85.5 48.56,73.3 33.88,64.67 31.57,84.76 29.18,58.72 41.88,43.71 41.78,47.35 51.87,48.9 51.33,53.75 40.08,31.75 37.21,22.38 77.8,64.82 81,64.92 79.38,66.34 79.45,64.8 77.85,67.82 80.92,67.87 79.35,69.44
  pour Top (rank 4): 12.7,86.36 88.9,86.36 88.9,0 12.7,0
  pour Bottom (rank 4): 12.7,86.36 88.9,86.36 88.9,0.51 12.7,0.51
  pour Top (rank 4): 12.73,86.36 88.93,86.36 88.93,0 12.73,0
GNDIO
  Top 1.016: 88.47,94.69 CASE1.41 88.65,94.74 86.74,94.74 85.62,93.62 85.62,88.29 83.49,86.16 L3.1
HV-SENSE  (via drill 0.6)
  Top 0.254: U10.2 71.71,67.41 v73.43,67.41 73.08,67.06 73.08,65.08 72.64,64.64 R1.1
  Bottom 0.254: v73.43,67.41 73.25,67.59 73.25,71.58 73.71,72.03 75.49,72.03 76.22,72.77 76.22,76.07 77.04,76.89 84.12,76.89 86.69,79.45 86.69,87.25 87.73,88.29 91.9,88.29 92.46,88.85 92.46,90.5 CASE1.45
N$1
  Top 0.406: LED8.A R13.1
N$3
  Top 0.813: QE1.3 61.41,54.3 62.99,55.88 62.99,58.3 K1.A1
  Bottom 0.813: D1.A 62.3,60.74 62.97,60.07 K1.A1
N$4
  Top 0.305: R24.1 LED1.A
N$5
  Top 0.813: QE2.3 55.58,58.21 K1.A2
  Bottom 0.813: D2.A 56.24,60.77 55.45,59.97 55.45,58.34 K1.A2
N$6
  Top 0.406: LED6.A R23.1
N$7
  Top 0.305: QE2.1 54.52,52.15 R7.2 54.52,48.35 54.91,47.95 57.39,47.95 R8.2
N$8
  Top 0.254: R9.1 87.05,78.54 87.38,78.87 87.38,80.08 LED3.A
N$10
  Top 0.254: U11.7 R11.1 45.19,71.26 R12.2
N$11
  Top 0.305: LED4.A 74.17,61.72 74.93,62.48 R10.1
N$12
  Top 0.305: LED5.A R14.1
N$13
  Bottom 1.676: CASE1.33 61.49,90.7 58.67,87.88 58.67,80.01 57.4,78.74 55.57,78.74 K1.21
N$14
  Top 0.305: R52.2 23.8,35.08 24.05,35.33 25.16,35.33 U15.9
N$15
  Top 0.305: TX1.A 17.11,38.31 16.51,38.91 16.51,40.39 16.82,40.69 16.52,41 R15.1
N$16
  Top 0.305: RX1.A 27.79,43.96 R16.1
N$17
  Top 0.305: U15.7 17.61,35.98 TX1.C
N$18
  Top 0.305: U15.14 26,38.52 27,39.52 27.57,39.52 RX1.C
N$19
  Top 0.305: R18.1 71.73,49.24 TX2.A
N$20
  Top 0.305: U15.4 20.89,37.88 21.11,38.1 21.11,39.88 22.88,41.66 22.88,42.67 23.09,42.88 U4.2 | U4.2
N$21
  Top 0.305: U15.1 19.89,40.95 20.4,41.45 21.79,41.45 22.23,41.96 22.23,43.2 22.55,43.54 U4.3
N$22
  Top 0.305: LED2.A R38.1
N$23
  Top 0.254: R39.1 LED7.A
N$25
  Top 0.254: CASE1.1 4.95,98.68 6.86,96.77 10.41,96.77 10.92,96.27 10.92,93.22 11.43,92.71 14.22,92.71 14.73,92.2 14.73,89.92 18.03,86.61 18.03,83.97 U7.5
N$27
  Top 0.305: SJ3.1 43.73,7.44 U9.1
N$28  (via drill 0.5)
  Top 0.305: U12.17 47.78,27.96 v47.5,27.69
  Bottom 0.305: L4.1 45.62,29.33 C2.1 47.5,29.28 v47.5,27.69
N$29  (via drill 0.5)
  Top 0.305: U12.7 44.95,24.4 44.68,24.66 v44.35,24.66
  Bottom 0.305: v44.35,24.66 46.48,24.66 C12.A
N$30
  Top 0.305: QE1.1 59.1,52.12 R21.2 59.1,49.06 59.61,48.54 59.61,47.94 R22.1
N$31
  Top 0.254: CASE1.2 6.15,94.69 6.86,93.98 6.86,89.15 7.37,88.65 14.99,88.65 16.51,87.12 16.51,83.97 U7.6
N$33
  Top 0.254: CASE1.3 4.93,88.8 5.84,87.63 14.73,87.63 15.49,86.87 15.49,83.97 U7.7
N$34  (via drill 0.6)
  Top 0.254: U7.8 14.1,85.98 13.46,86.61 v11.18,86.61
  Bottom 0.254: CASE1.4 8,98.68 6.86,97.54 6.86,87.63 7.87,86.61 v11.18,86.61
N$35  (via drill 0.6)
  Top 0.254: 24.64,83.97 U8.5 24.46,83.9 24.46,88.9 23.98,89.38 v23.98,92.61
  Bottom 0.254: CASE1.5 8.94,94.69 10.92,92.71 23.88,92.71 v23.98,92.61
N$36
  Bottom 1.676: CASE1.32 58.75,94.69 56.01,91.95 56.01,84.23 K1.24
N$37  (via drill 0.6)
  Top 0.254: v23.11,87.96 23.11,83.97 U8.6
  Bottom 0.254: CASE1.6 8.89,88.9 9.65,88.14 22.86,88.14 v23.11,87.96
N$38
  Top 0.254: CASE1.7 12.85,98.65 14.73,96.77 22.35,96.77 22.86,96.27 22.86,89.66 21.84,88.65 21.84,83.97 U8.7
N$39
  Top 0.254: CASE1.8 13.51,94.69 15.49,92.71 18.29,92.71 18.8,92.2 18.8,88.65 20.57,86.87 20.57,83.97 U8.8
N$40
  Top 0.305: R17.1 68.17,49.27 RX2.A
N$42  (via drill 0.6)
  Top 0.406: v60.58,85.11 60.58,97.08 62.1,98.6 64.06,98.6 64.08,98.58 64.82,98.58 CASE1.31
  Bottom 0.406: K1.11 60.71,78.68 60.38,79.02 60.38,84.91 v60.58,85.11
N$43
  Top 0.305: QE6.3 70.58,74.36 71.04,74.83 71.04,76.16 R6.1
  Top 0.406: Q8.4 71.25,76.44 R6.1
N$44
  Top 0.254: U12.22 51.24,31.96 51.82,32.54 R39.2
N$45
  Top 0.305: JP5.1 37.39,13.95 37.39,10.54 37.85,10.08 R19.1 37.77,9.94 37.77,7.67 38,7.44 SJ3.2
  Bottom 0.305: JP5.1 37.39,13.95 37.39,10.82 37.76,10.45 C6.1 37.86,10.08 R19.1 37.77,9.94 37.77,9.27 38.15,8.89 40.77,8.89 41.61,9.73 R20.1
  Bottom 0.406: S1.3 34.27,12.42 35.38,13.54 36.98,13.54 JP5.1
N$46  (via drill 0.6)
  Top 0.254: U12.18 51.47,28.77 51.59,28.88 51.59,29.62 51.79,29.82 57.3,29.82 59.64,32.13 v60.3,32.13
  Bottom 0.254: v60.3,32.13 59.97,32.13 59.69,31.9 59.69,18.11 58.6,17.02 51.13,17.02 50.19,16.08 50.19,10.49 49.53,9.83 44.69,9.83 R20.2
N$47
  Top 0.305: U12.8 45.77,17.12 45.03,16.38 45.03,13.77 JP5.4
N$48
  Top 0.305: U12.9 46.57,16.9 47.6,15.88 JP5.5
N$50
  Top 0.305: LED12.A R42.1
N$54
  Top 0.305: R53.2 21.64,34.82 21.13,35.33 U15.8
N$55
  Top 0.305: C11.1 R52.1 23.8,28.3 JP13.3
N$61
  Top 0.305: C13.1 R53.1 21.64,28.07 JP13.2
N$62  (via drill 0.5)
  Top 0.305: v22.91,40.16 24.8,40.16 U15.16
  Bottom 0.305: SJ1.2 22.71,39.95 v22.91,40.16
N$63
  pour Top: 78.41,84.89 79.5,84.89 80.09,84.28 81.38,84.28 81.58,84.07 81.58,81.38 81.38,81.18 78.82,81.18 78.41,81.58
N$69
  Top 0.305: R29.1 18.15,43.7 18.97,42.88 U4.7 | U4.7
N$72
  Top 0.254: U20.4 17.89,68.86 18.47,68.28 18.47,48.62 19.56,47.5 19.56,43.74 19.79,43.51 20.81,43.51 U4.6
N$78  (via drill 0.6)
  Top 0.254: U4.5 20.84,47.54 19.61,48.77 v19.61,54.79 | v25.38,67.18 25.3,67.28 25.04,67.54 22.62,67.54 U20.11
  Bottom 0.254: v19.61,54.79 19.61,66.24 20.52,67.16 24.71,67.16 v25.38,67.18
N$85  (via drill 0.5)
  Top 0.305: U15.12 23.23,37.25 22.68,36.7 22.68,35.81 v22.71,35.79
  Bottom 0.305: v22.71,35.79 22.71,35.31 22.35,34.95 22.35,32 22.5,31.85 23.63,31.85 C23.1 C22.A
  Bottom 0.61: JP13.4 26.52,31.57 C22.A
RS-A
  Top 0.254: CASE1.35 67.41,94.69 67.13,94.41 67.13,87.78 65.51,86.16 65.51,61.95 65.86,61.59 70.26,61.59 70.66,61.19 U5.6
  Bottom 0.254: R32.1 76.15,93.17 75.69,92.71 69.85,92.71 69.09,93.47 69.09,94.49 CASE1.35
RS-B
  Top 0.254: CASE1.34 67.03,98.68 66.65,98.3 66.65,88.24 64.9,86.49 64.9,61.34 65.23,61.01 69.11,61.01 69.42,60.71 69.42,59.33 U5.7
  Bottom 0.254: R32.2 75.89,96.2 75.44,96.65 70.92,96.65 CASE1.34
RX2  (via drill 0.6)
  Top 0.254: U5.1 68.12,53.42 | 68.12,53.42 68.12,51.42 RX2.C | v65.05,45.77 65.05,52.22 66.22,53.39 68.1,53.39 68.12,53.42
  Top 0.305: v44.32,19.3 44.09,19.3 43.38,20.02 43.38,22.13 U12.5
  Bottom 0.254: 57.61,26.64 57.61,43.76 58.6,44.76 64.03,44.76 v65.05,45.77
  Bottom 0.305: 57.61,26.64 57.61,25.58 56.74,24.71 56.74,19.99 55.91,19.15 44.48,19.15 v44.32,19.3
S0  (via drill 0.6)
  Top 0.254: U12.34 38.34,32.85 v37.85,33.35 | 22.63,66.88 U20.10
  Top 0.305: 22.63,66.88 23.67,66.88 24,66.55 24,64.64 24.26,64.39 24.94,64.39 v24.99,64.34
  Bottom 0.254: v37.85,33.35 33.68,33.35 33.25,33.78 33.25,52.53 29.29,56.49 25.48,56.49 24.44,57.53 24.44,63.78 v24.99,64.34
S1  (via drill 0.6)
  Top 0.254: U12.33 40.14,34.71 39.8,35.05 37.57,35.05 v37.26,35.36 | v25.71,62.99 23.72,62.99 22.86,63.86 22.86,66 U20.9
  Bottom 0.254: v37.26,35.36 34.67,35.36 33.98,36.04 33.98,52.76 29.64,57.1 25.73,57.1 25.04,57.79 25.04,62.79 25.25,62.99 v25.71,62.99
SCL
  Top 0.254: 39.75,53.38 40.42,53.38 40.79,53.01 40.79,47.78 40.21,47.19 36.17,47.19 35.66,46.69 35.66,24.56 36.27,23.95 38.33,23.95 U12.44 | 39.75,53.38 37.64,53.38 37.59,53.43 37.57,53.41 R2.1 | Q2.2 39.73,53.41 39.75,53.38
SCL_5V
  Top 0.254: CASE1.29 51.18,94.69 50.77,94.28 50.77,88.06 52.43,86.41 52.43,57.25 51.51,56.34 44.91,56.34 44.15,55.58 44.15,54.39 44.08,54.33 R4.1 41.61,54.33 Q2.3
SDA
  Top 0.254: 37.67,48.81 39.72,48.81 39.69,48.84 Q4.2 | 37.67,48.81 37.59,48.88 | 37.59,48.88 37.54,48.94 | 37.67,48.81 36.34,48.81 35.13,47.6 35.13,21.39 35.48,21.03 39.93,21.03 40.21,21.31 40.21,22.1 U12.1 | R3.1 37.59,48.88
SDA_5V
  Top 0.254: CASE1.30 52.48,87.58 53.14,86.92 53.14,52.3 52.38,51.54 42.6,51.54 41.94,50.88 41.94,49.91 | 41.94,49.91 41.94,49.78 41.92,49.76 44.08,49.76 R5.1 | Q4.3 41.83,49.81 41.94,49.91
SEN0  (via drill 0.5)
  Top 0.254: U11.5 41.27,66.17 42.42,65.02 46.1,65.02 v46.36,64.77 | U12.26 45.74,38 46.74,38.99 v46.74,40.66
  Bottom 0.254: v46.36,64.77 45.97,64.77 45.59,64.39 45.59,41.53 45.97,41.15 46.36,41.15 46.74,40.79 v46.74,40.66
SEN1  (via drill 0.5)
  Top 0.254: U11.6 42.55,67.44 43.56,66.42 45.34,66.42 v45.59,66.17 | U12.27 44.95,38.85 v45.59,39.5
  Bottom 0.254: v45.59,66.17 45.47,66.17 45.09,65.79 45.09,41.15 45.59,40.64 v45.59,39.5
SEN_EN  (via drill 0.5)
  Top 0.254: U11.3 38.73,66.55 41.27,64.01 45.85,64.01 v46.48,63.37 | v52.45,25.35 51.94,25.53 49.98,25.53 U12.14
  Bottom 0.254: v46.48,63.37 46.23,63.12 46.23,43.18 49.53,39.88 51.69,39.88 52.2,39.37 52.2,25.6 v52.45,25.35
TSAL
  pour Top (no thermals): 67.18,83.31 67.18,85.29 67.67,85.85 67.77,86.31 67.72,91.62 68.38,92.18 69.57,92.18 70.28,91.59 70.26,86.33 70.54,85.95 70.84,85.7 70.94,85.7 73.03,85.72 73.79,84.96 73.79,83.31 73.53,83.06 67.44,83.06
TSAL_EN
  Top 0.305: U10.4 68.67,68.8 R41.2 QE6.1
TX2  (via drill 0.6)
  Top 0.254: TX2.C 71.93,51.6 U5.4 71.93,56.13 71.2,56.87 67.49,56.87 66.5,55.88 66.5,55.19 63.3,51.99 v63.3,42.34
  Top 0.305: U12.4 42.55,18.16 v43.1,17.6
  Bottom 0.254: 59.13,26.52 59.13,42.22 59.64,42.72 62.92,42.72 v63.3,42.34
  Bottom 0.305: 59.13,26.52 59.16,26.49 59.16,18.9 57.89,17.6 v43.1,17.6
U5-RE/DE  (via drill 0.6)
  Top 0.254: U5.3 U5.2 69.34,54.13 69.34,55.8 69.04,56.11 67.67,56.11 67.13,55.58 67.13,55.04 63.98,51.89 63.98,43.81 64.24,43.56 v64.47,43.56
  Top 0.305: v57.96,22.89 57.96,22.58 57.35,21.97 48.34,21.97 U12.11
  Bottom 0.254: 58.37,26.39 58.37,43 59.03,43.66 64.36,43.66 v64.47,43.56
  Bottom 0.305: 58.37,26.39 58.37,23.29 v57.96,22.89
V+  (via drill 0.48, 0.5, 0.6)
  Top 0.254: U11.EP 40.64,78.77 40.39,78.51 40.39,78.23 v40.64,77.98
  Top 0.305: R14.2 49.94,74.91 v49.66,75.18
  Top 0.406: R6.2 68.96,76.2 68.71,76.45 Q8.2
  Bottom 0.305: v49.66,75.18 49.66,76.2 49.4,76.45
  Bottom 0.61: 61.76,65 D1.C | 50.65,76.5 49.96,76.5 49.66,76.2
  Bottom 0.813: K1.A3 59.21,65.05 | 56.73,65.05 D2.C 56.51,65.28 | D1.C | v40.64,77.98 43.18,77.98 44.7,76.45
  Bottom 1.016: CASE1.42 88.7,91.36 90.04,92.71 94.64,92.71 CASE1.47 | 44.98,76.5 50.65,76.5 51.82,75.34 51.82,66.47 53.24,65.05 56.41,65.05 | 56.41,65.05 59.21,65.05 D1.C 65.46,65.05 66.78,66.37 66.78,80.01 67.06,80.29 69.37,80.29 v69.6,80.52 | 56.51,65.28 56.51,65.14 56.41,65.05
  Bottom 1.27: v40.64,77.98 43.51,77.98 44.98,76.5
  Bottom 1.93: CASE1.46 CASE1.47 96.62,100.61 95.5,101.73 34.8,101.73 32.51,99.44 32.51,88.14 33.91,86.74 38.48,86.74 38.61,86.61
  other vias: 68.2,80.52 37.59,81.03 39.62,81.03 41.66,81.03 38.61,80.01 40.64,80.01 38.61,77.98 43.69,81.03 42.67,80.01 37.59,78.99 39.62,78.99 41.66,78.99 43.69,78.99 42.67,77.98 39.62,76.96 41.66,76.96 43.69,76.96 37.59,76.96
  pour Top: 67.06,77.47 67.06,80.77 67.31,81.03 70.1,81.03 70.36,80.77 70.36,77.47 70.1,77.22 67.31,77.22
  pour Bottom (no thermals): 38.86,91.69 39.37,92.2 41.91,92.2 42.42,91.69 42.42,89.15 43.18,88.39 44.96,88.39 45.47,87.88 45.47,75.95 44.7,75.18 36.58,75.18 35.81,75.95 35.81,87.88 36.32,88.39 38.1,88.39 38.86,89.15
VCCIO
  Top 1.016: CASE1.40 88.7,98.55 85.93,98.55 84.15,96.77 84.15,90.02 80.82,86.69 80.82,85.41 L1.1 80.9,85.43
VSS
  Top 0.305: R7.1 QE2.2 | R21.1 61.1,52.17 QE1.2
  Top 0.813: K1.14 62.34,83.73 61.19,82.58 61.16,82.58 60.78,82.19 60.78,60.33 | 60.78,60.33 60.78,59.82 61.09,59.51 61.09,56.46 60.63,56.01 58.34,56.01 57.76,55.42 57.76,52.27 56.55,52.27 QE2.2 | QE1.2 61.34,52.2 64.95,55.8 64.95,59.41 64.13,60.22 60.88,60.22 60.78,60.33
  Bottom 1.778: K1.14 62.96,86.4 64.47,87.91 71.93,87.91 72.77,88.75 72.77,90.63 CASE1.39
WDI
  Top 0.305: U12.10 47.34,17.65 48.23,16.76 49.28,16.76 49.66,16.38 49.66,11.18 48.64,10.16 45.75,10.16 U9.4

## Text on the board
_tsilk: Q8 | L1 | R13 | V1 | L3 | RJ | R38 | LED6 | R23 | LED8 | + | R42 | D7 | U7 | U8 | + | R9 | R6 | LED12 | C32 | LED3 | LED2 | U11 | R12 | R11 | QE6 | R14 | R41 | IC1 | C5 | LED5 | U10 | R1 | C4 | U20 | C1 | R10 | LED4 | R2 | Q2 | R4 | K1 | U5 | U2 | QE2 | QE1 | TX2 | R5 | R7 | R21 | RX2 | R29 | R3 | Q4 | U15 | C7 | R8 | R22 | R16 | Y1 | R17 | R18 | C80 | RX1 | R15 | LED1 | C21 | R24 | C24 | TX1 | + | R39 | LED7 | C11 | C13 | R53 | R52 | U12 | JP5 | S1 | R19 | C8 | U9 | SJ3 | "BMM" / Battery Managment Master
_bsilk: R32 | C14 | C10 | C15 | D2 | D1 | C3 | SJ1 | C22 | C19 | C23 | L4 | C2 | R25 | C18 | C12 | R20 | C6